# Altium PCB uarttors485_2.PcbDoc
Units mil, origin at the board's own origin, x right, y up, seen from the top; angles counter-clockwise.
Board outline 1929.13 x 1751.97 mil, 2 copper layers (Top Layer, Bottom Layer); 15 components, 10 nets, 44 pads, 3 vias.
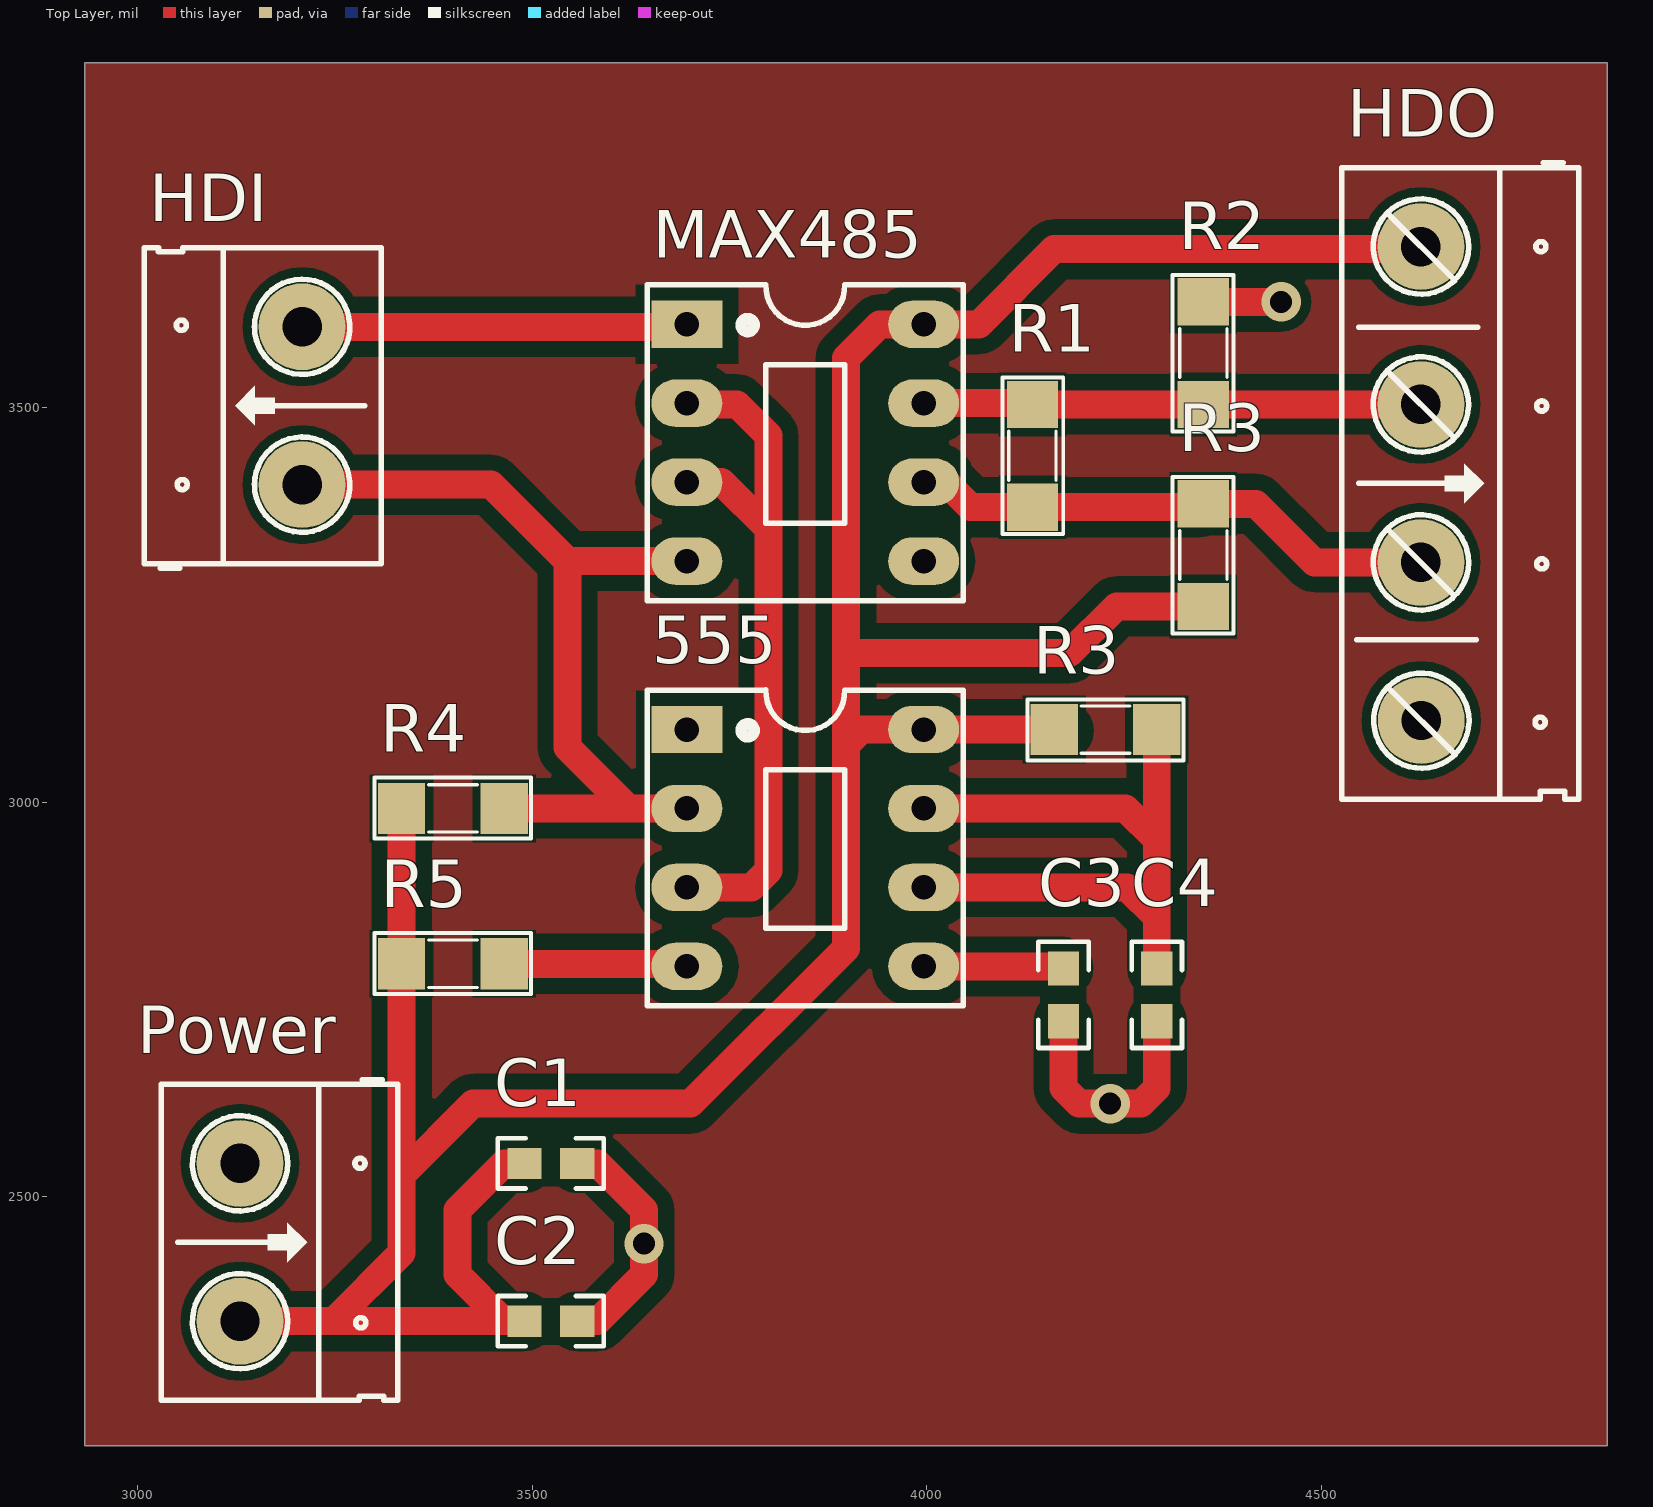
[diagram p0: Top Layer view]
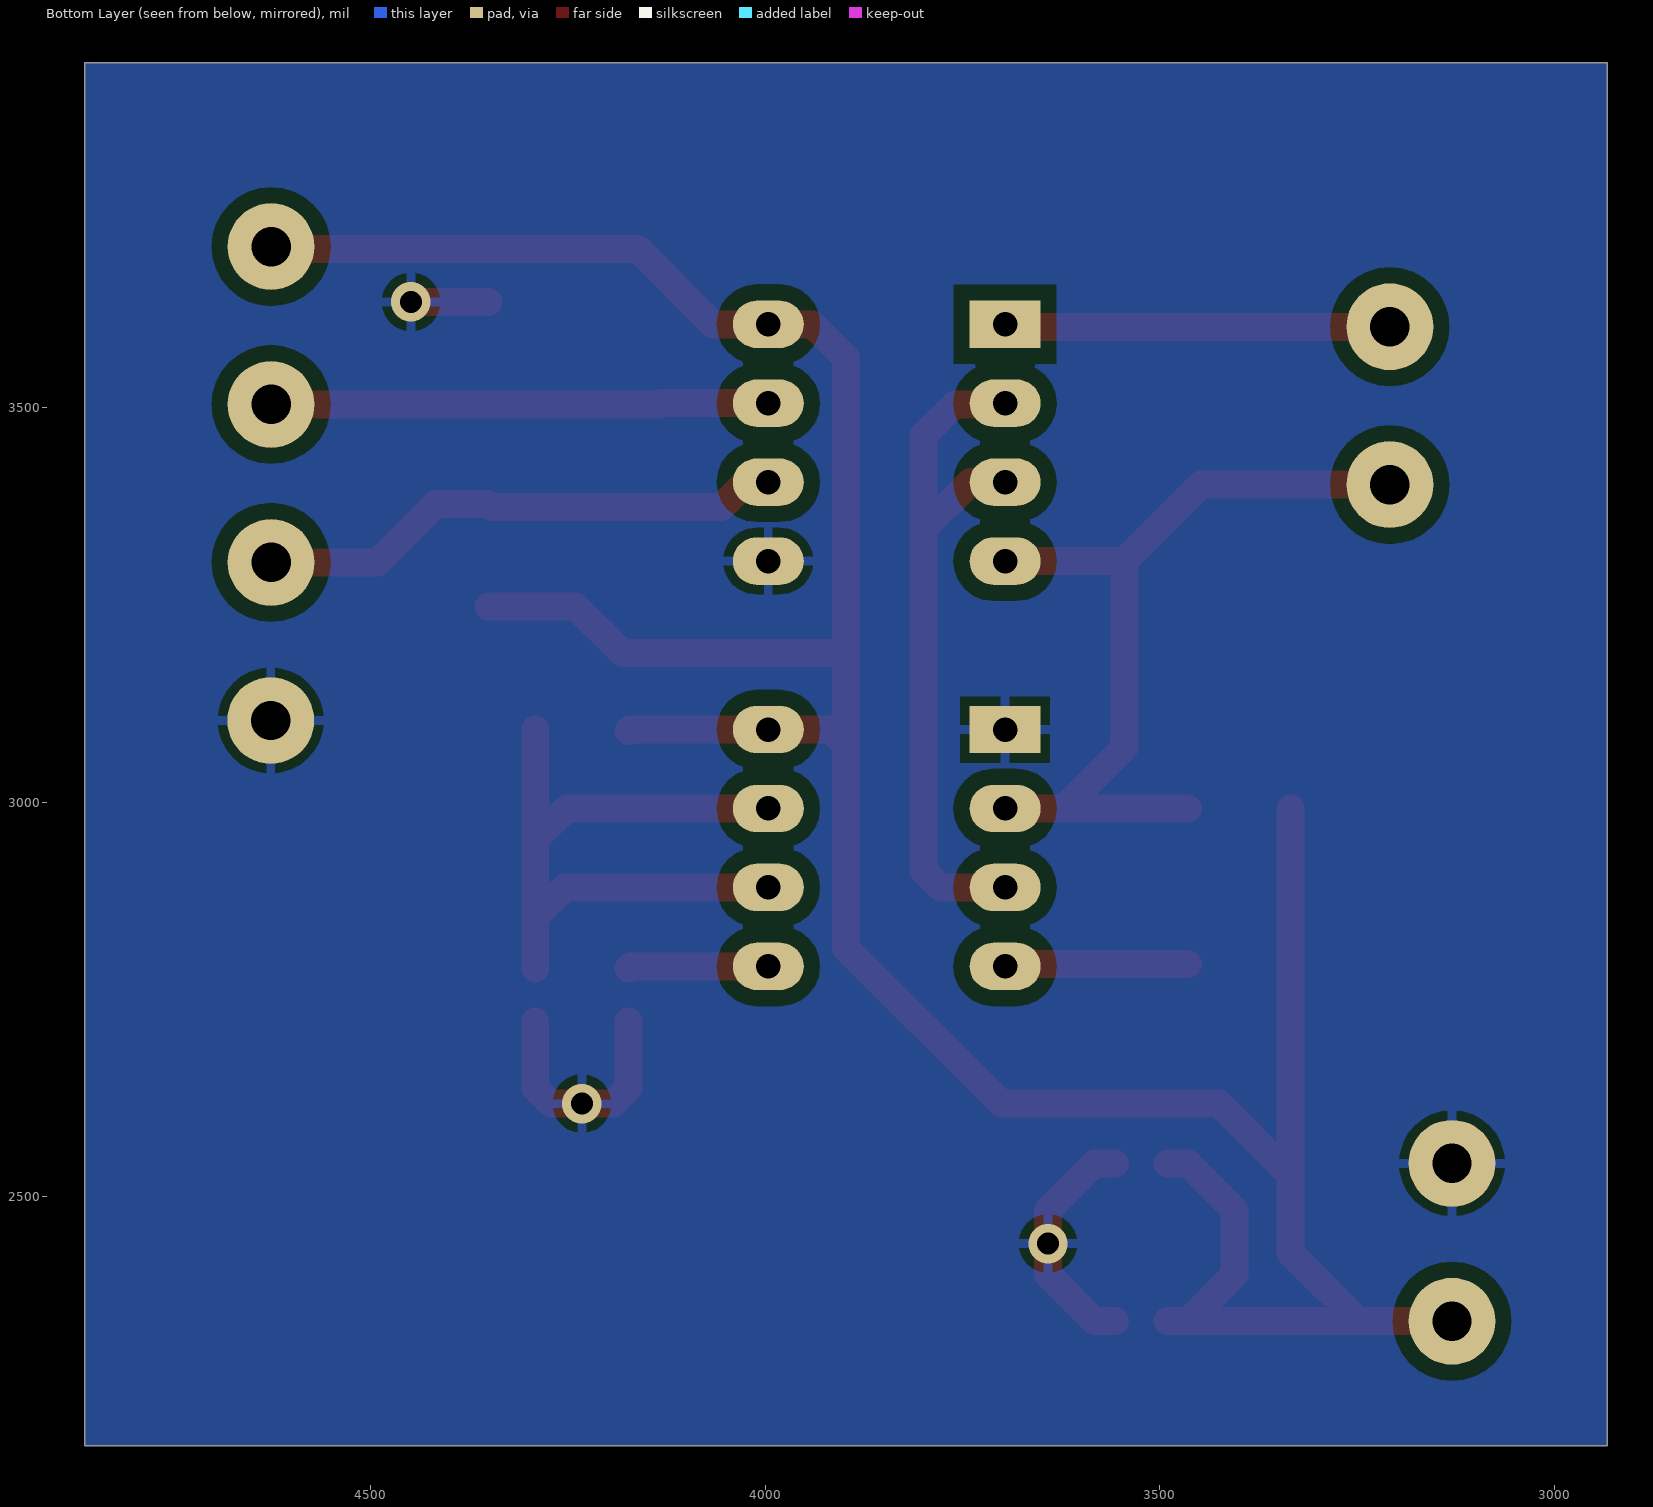
[diagram p1: Bottom Layer view, seen from below]
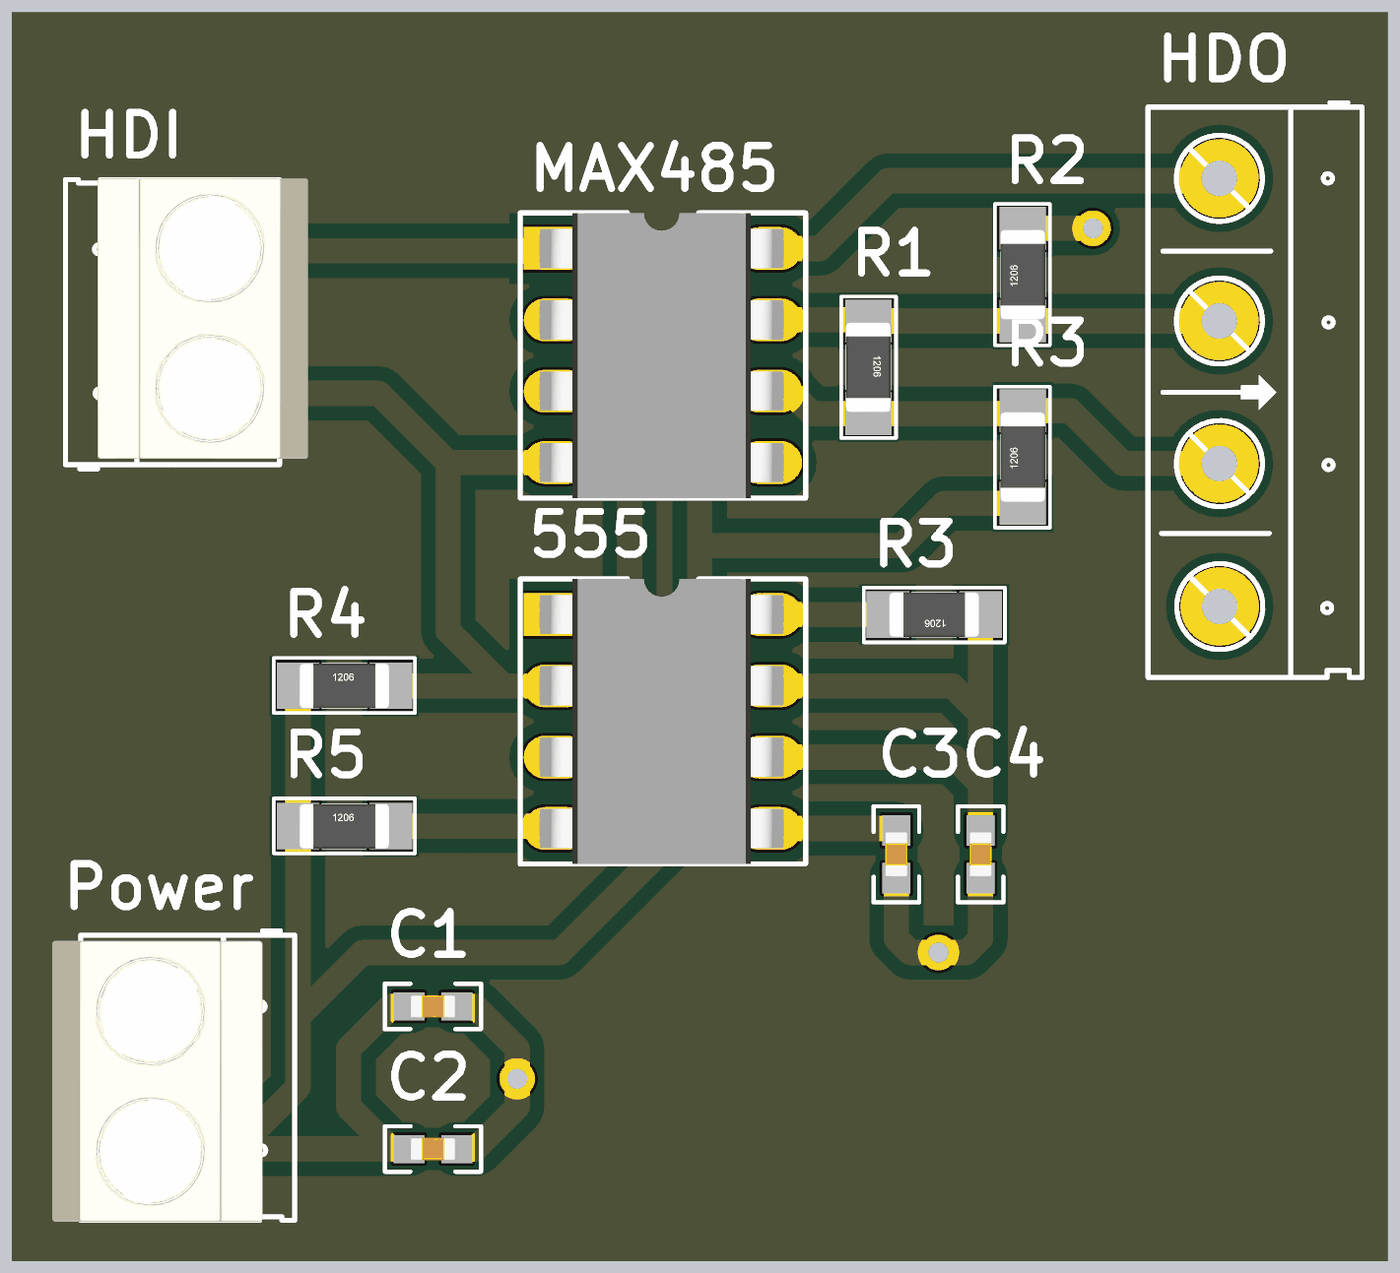
[diagram p2: 3D render of the assembled board from above, using the file's embedded part models]

## Layer stack, top to bottom
Top Solder: solder mask 0.4, Solder Resist, Dk 3.5
Top Layer: signal copper 1.4
Dielectric 1: dielectric 12.6, FR-4, Dk 4.8
Bottom Layer: signal copper 1.4
Bottom Solder: solder mask 0.4, Solder Resist, Dk 3.5

## Board outline
2933.07,3937.01 4862.2,3937.01 4862.2,2185.04 2933.07,2185.04

## Design rules (kind name [scope] priority, off if disabled: settings)
Clearance Clearance_2 [InNamedPolygon('Top Layer-No Net')] p1: gap=10 ignorepadtopadclearanceinfootprint=FALSE except(0: Arc-Hole Track-Hole SMDPad-Hole THPad-Hole Via-Hole Fill-Hole Poly-Hole Region-Hole Text-Hole; 20: Arc-Fill Arc-Poly Arc-Region Track-Fill Track-Poly Track-Region THPad-Fill THPad-Poly THPad-Region)
Clearance Clearance_1 [InNamedPolygon('Bottom Layer-No Net')] p2: gap=10 ignorepadtopadclearanceinfootprint=FALSE except(0: Arc-Hole Track-Hole SMDPad-Hole THPad-Hole Via-Hole Fill-Hole Poly-Hole Region-Hole Text-Hole; 20: Arc-Fill Arc-Poly Arc-Region Track-Fill Track-Poly Track-Region THPad-Fill THPad-Poly THPad-Region)
Clearance [All] p3: gap=10 ignorepadtopadclearanceinfootprint=FALSE except(0: Arc-Hole Track-Hole SMDPad-Hole THPad-Hole Via-Hole Fill-Hole Poly-Hole Region-Hole Text-Hole)
PolygonConnect PolygonConnect_1 [All vs IsNamedPolygon('Bottom Layer-No Net')] p1: connectstyle=Relief reliefconductorwidth=11.81 reliefentries=4 polygonreliefangle="90 Angle" airgapwidth=11.81
PolygonConnect [All] p2: connectstyle=Relief reliefconductorwidth=10 reliefentries=4 polygonreliefangle="90 Angle" airgapwidth=10
RoutingVias [All] p1: holewidth=28 width=50 viastyle="Through Hole" minholewidth=28 minwidth=50 maxholewidth=28 maxwidth=50
SolderMaskExpansion [All] p1: expansion=4
Width [All] p1: maxlimit=43.31 minlimit=35.43 preferedwidth=39.37
30 further rules are at their usual default settings.

## Classes and differential pairs
component class uartto485: 555 C3 C4 HDI HDO MAX485 R1 R2 R3 R4 R5
component class power: C1 C2 Power

## Components (designator, comment, footprint, x,y, rotation, side; value= is the part's Value field where it differs from the comment)
555 "LM555" DIP8/W0.3 3696.06,3092.13 r270 top
C1 "22uF" "CAPC-0603 (1608)" 3523.62,2542.52 r180 top value=33p/50V
C2 "22uF" "CAPC-0603 (1608)" 3523.62,2342.52 r180 top value=33p/50V
C3 "10uF" "CAPC-0603 (1608)" 4173.23,2755.91 r90 top value=33p/50V
C4 "0.01uF" "CAPC-0603 (1608)" 4291.34,2755.91 r90 top value=33p/50V
HDI "Header 2_1" HED2 3208.66,3402.36 r90 top value="Header 2"
HDO "Header 4" HED4 4625.98,3703.94 r270 top
MAX485 "MAX485" DIP8/W0.3 3696.06,3605.51 r270 top
Power "Header 2_1" HED2 3129.92,2542.52 r270 top value="Header 2"
R1 "120" SM-RES-1206 4133.86,3503.94 r270 top value="R1/4W - 1K"
R2 "20k" SM-RES-1206 4350.39,3503.94 r90 top value="R1/4W - 1K"
R3 "20k" SM-RES-1206 4350.39,3248.03 r90 top value="R1/4W - 1K"
R3 "6.8k" SM-RES-1206 4291.34,3092.13 r180 top value="R1/4W - 1K"
R4 "10k" SM-RES-1206 3334.57,2992.13 r0 top value="R1/4W - 1K"
R5 "1k" SM-RES-1206 3334.57,2795.28 r0 top value="R1/4W - 1K"

## Footprints (in the part's own frame and the unit in brackets; to place one, negate y for a bottom-side part, rotate by r counter-clockwise, add the part's x,y. Pads: shape width x height; smd on the part's side, far side on the other; paste and mask are expansions set on the pad)
"CAPC-0603 (1608)" [mm] "Resistor, Chip; 1.60 mm L X 0.80 mm W X 0.50 mm H body"
  rect 1.1x1 smd mask+0.1: 1(-0.85,0) 2(0.85,0)
  silkscreen extent -1.71,-0.81 1.71,0.81, body extent -0.8,-0.4 0.8,0.4, height 0.6
DIP8/W0.3 [mil] "8 PIN, W 300mil, Pin to pin 100mil"
  rect 60x90 hole 31: 1(0,0)
  oval 60x90 hole 31: 2(100,0) 3(200,0) 4(300,0) 5(300,300) 6(200,300) 7(100,300) 8(0,300)
  silkscreen extent -50,-50 350,350, body extent -50,-40 350,336, height 201
HED2 [mil] "Header 2, 2 pin, hight 300mil, Pin to Pin 200, Colour Green"
  round 110 hole 50: 1(0,0) 2(200,0)
  silkscreen extent -106,-100 300,200, body extent -92,-140 302,155, height 394
HED4 [mil] "Header 4, 4 pin, hight 300mil, Pin to Pin 200, Colour Green"
  round 110 hole 50: 1(0,0) 2(200,0) 3(400.06,0.06) 4(600.39,0.39)
  silkscreen extent -106,-100 700,200
SM-RES-1206 [mil]
  rect 60x65 smd: 1(0,0) 2(130,0)
  silkscreen extent -34,-38 164,39, body extent 2,-31 128,32, height 40

## Part data
555: "Timer"
C1 C2 C3 C4: library part 0603N330J500CT, "CAP CER 33pF 50V 5%  0603", MPN="CL10C330JB8NNNC, 0603N330J500CT", Category=CAPACITOR, CompanyID=VT-01106, PinCount=2, Solder=SMT
HDI Power: "Header, 2-Pin", Manufacturer="Generic Components", Class=Connector
HDO: library part Hed4, "Header 4 (Green)"
MAX485: "RS232 - RS485 (Same sn75176)"
R1 R2 R3 R3 R4 R5: library part R, "Resistor 1/4W"

## Via types
v1: diameter 50, hole 28, Top Layer to Bottom Layer, 3 vias

## Nets (pads, with @x,y where several pads share a name; then routed paths per layer and width w, separated by ;. In a path a pad name is that pad's centre, name@x,y a point inside that pad or via, vN(x,y) a via of type N, cw(c..) or ccw(c..) an arc to the next point about the centre after c; other vN are vias at no path point)
GND: 555.1 C1.1 C2.1 C3.1 C4.1 HDO.4 MAX485.5 Power.1 R2.2 | length 702.2
  Top Layer w35.43: C2.1 3582.68,2342.52 3641.73,2401.57 3641.73,2483.46 3582.68,2542.52 C1.1 ; C3.1 4173.23,2637.8 4192.91,2618.11 4271.65,2618.11 4291.34,2637.8 C4.1 ; R2.2 v1(4448.82,3633.94)
  other v1: 3641.73,2440.94 4232.28,2618.11
Net555_2: 555.2 HDI.1 MAX485.4 R4.2 | length 1104.4
  Top Layer w35.43: HDI.1 3448.03,3402.36 3544.88,3305.51 ; R4.2 3622.05,2992.13 ; 555.2 3622.05,2992.13 ; MAX485.4 3544.88,3305.51 ; 3544.88,3305.51 3544.88,3069.29 3622.05,2992.13
Net555_3: 555.3 MAX485.2 MAX485.3 | length 910.9
  Top Layer w35.43: 555.3 3777.95,2892.13 3799.21,2913.39 3799.21,3346.46 ; MAX485.3 3740.16,3405.51 3799.21,3346.46 ; MAX485.2 3697.64,3503.94 3759.84,3503.94 3799.21,3464.57 3799.21,3346.46
Net555_4: 555.4 R5.2 | length 232.8
  Top Layer w35.43: R5.2 3692.91,2795.28 555.4
Net555_5: 555.5 C3.2 | length 178.3
  Top Layer w35.43: 555.5 4170.47,2792.13 C3.2
Net555_6: 555.6 555.7 C4.2 R3.1@4291.34,3092.13 | length 925.3
  Top Layer w35.43: 555.6 4253.54,2892.13 4291.34,2854.33 ; 555.7 4251.97,2992.13 4291.34,2952.76 ; C4.2 4291.34,2854.33 ; R3.1@4291.34,3092.13 4291.34,2952.76 ; 4291.34,2854.33 4291.34,2952.76
NetHDI_2: HDI.2 MAX485.1 | length 488.7
  Top Layer w35.43: HDI.2 3692.91,3602.36 MAX485.1
NetHDO_2: HDO.2 MAX485.7 R1.1 R2.1 | length 630.6
  Top Layer w35.43: MAX485.7 4132.28,3505.51 R1.1 R2.1 HDO.2
NetHDO_3: HDO.3 MAX485.6 R1.2 R3.2@4350.39,3378.03 | length 675.5
  Top Layer w35.43: MAX485.6 4023.54,3405.51 4055.12,3373.94 R1.2 4346.3,3373.94 4350.39,3378.03 4417.24,3378.03 4491.4,3303.88 HDO.3
VCC: 555.8 C1.2 C2.2 HDO.1 MAX485.8 Power.2 R3.1@4350.39,3248.03 R3.2@4161.34,3092.13 R4.1 R5.1 | length 4298.7
  Top Layer w35.43: Power.2 3248.03,2342.52 ; R4.1 R5.1 3334.57,2527.48 ; C2.2 3464.57,2342.52 ; C1.2 3464.57,2542.52 3405.51,2483.46 3405.51,2401.57 3464.57,2342.52 ; R3.2@4173.23,3090.55 4171.65,3092.13 4161.34,3092.13 555.8 3917.32,3092.13 3897.64,3072.44 ; R3.1@4350.39,3248.03 4240.08,3248.03 4181.02,3188.98 3897.64,3188.98 ; HDO.1 4622.83,3700.79 4161.34,3700.79 4066.06,3605.51 MAX485.8 3940.16,3605.51 3897.64,3562.99 3897.64,3188.98 ; 3248.03,2342.52 3464.57,2342.52 ; 3248.03,2342.52 3334.57,2429.06 3334.57,2527.48 ; 3334.57,2527.48 3425.2,2618.11 3700.79,2618.11 3897.64,2814.96 3897.64,3072.44 ; 3897.64,3072.44 3897.64,3188.98

## Polygon pours and split planes (outlines as drawn)
GND on Bottom Layer "Bottom Layer-No Net" (solid, pour order 2): 2933.07,3937.01 4862.2,3937.01 4862.2,2185.04 2933.07,2185.04
no net on Top Layer "Top Layer-No Net" (solid, pour order 4): 2933.07,3937.01 4862.2,3937.01 4862.2,2185.04 2933.07,2185.04